# Altium PCB PCB1.PcbDoc
Units mm, origin at the board's own origin, x right, y up, seen from the top; angles counter-clockwise.
Board outline 83.06 x 37.72 mm, 2 copper layers (Top Layer, Bottom Layer); 17 components, 15 nets, 69 pads, 0 vias.
Unrouted connection lines stored in the file: 1.
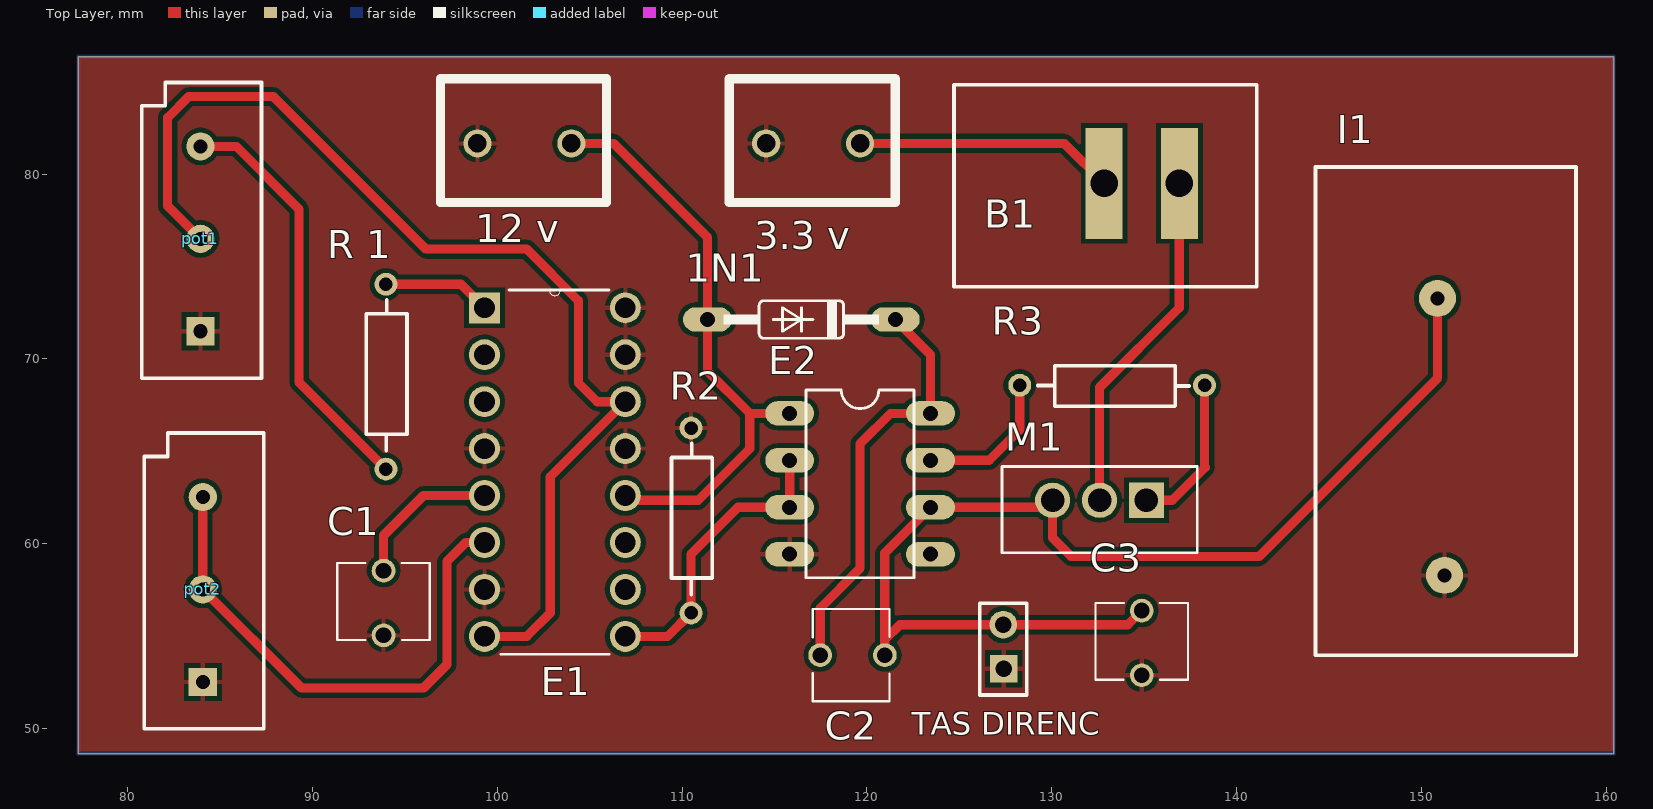
[diagram p0: Top Layer view]
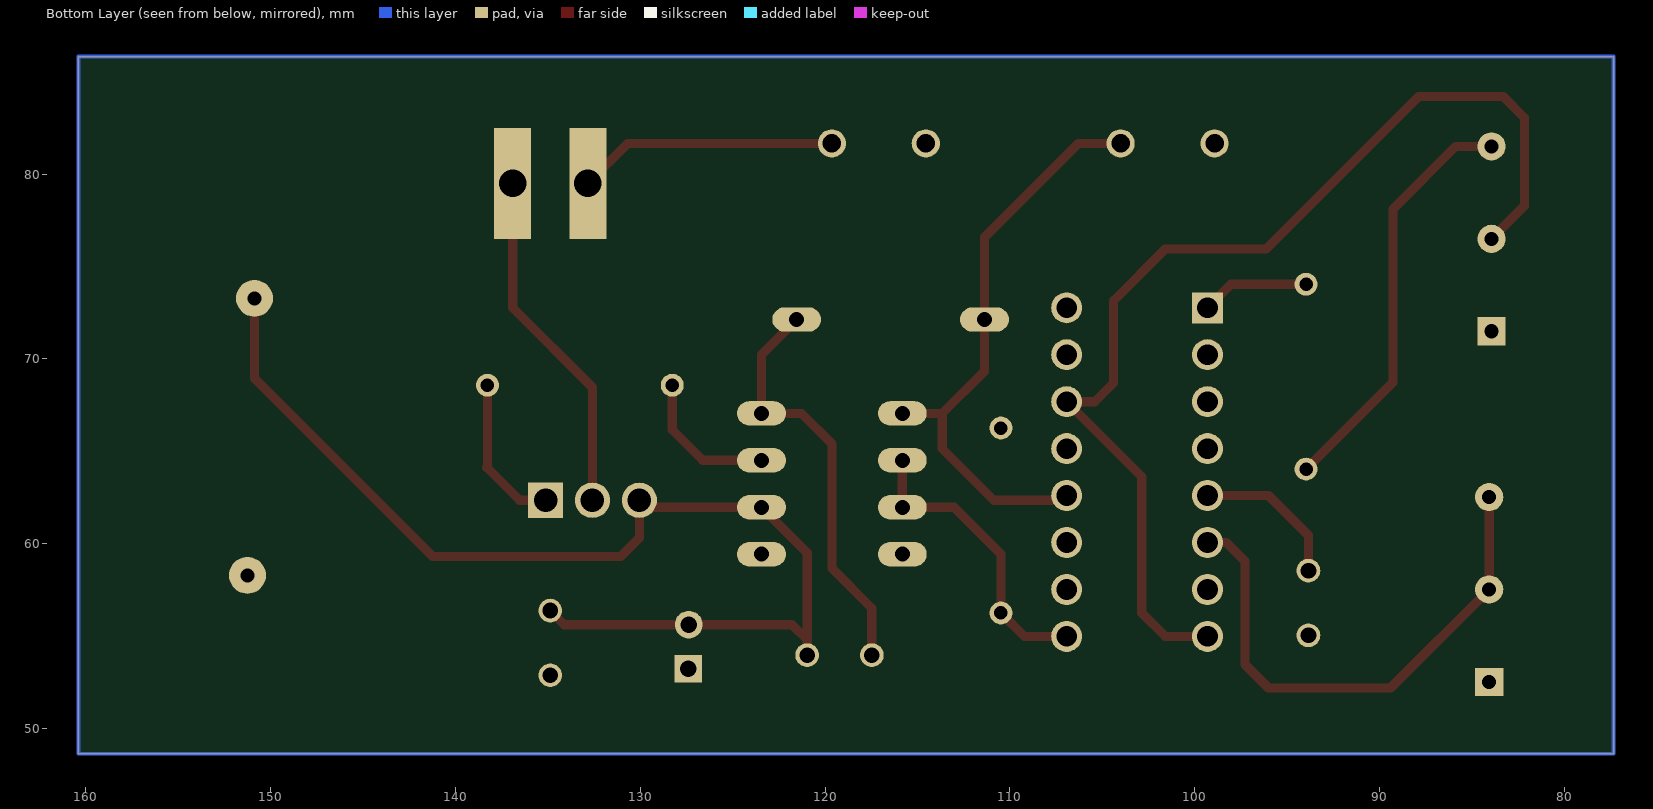
[diagram p1: Bottom Layer view, seen from below]
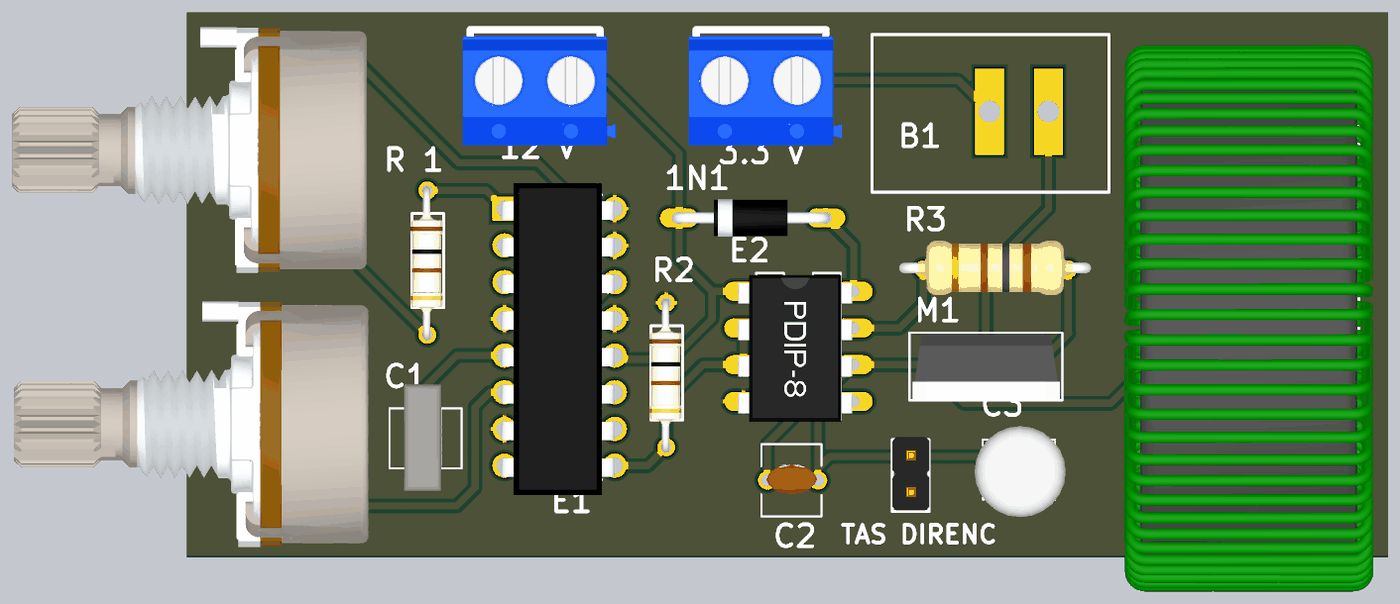
[diagram p2: 3D render of the assembled board from above, using the file's embedded part models]

## Layer stack, top to bottom
Top Solder: solder mask 0.0102, Solder Resist, Dk 3.5
Top Layer: signal copper 0.0356
Dielectric 1: dielectric 0.32, FR-4, Dk 4.8
Bottom Layer: signal copper 0.0356
Bottom Solder: solder mask 0.0102, Solder Resist, Dk 3.5

## Board outline
77.343,48.641 77.343,86.36 160.401,86.36 160.401,48.641

## Design rules (kind name [scope] priority, off if disabled: settings)
Clearance [All] p1: gap=0.254 ignorepadtopadclearanceinfootprint=FALSE except(0: Arc-Hole Track-Hole SMDPad-Hole THPad-Hole Via-Hole Fill-Hole Poly-Hole Region-Hole Text-Hole)
HoleToHoleClearance [All] p1: gap=0.1 allowstackedmicrovias=TRUE
PolygonConnect [All] p1: connectstyle=Relief reliefconductorwidth=0.254 reliefentries=4 polygonreliefangle="90 Angle" airgapwidth=0.254
RoutingVias [All] p1: holewidth=0.711 width=1.27 viastyle="Through Hole" minholewidth=0.711 minwidth=1.27 maxholewidth=0.711 maxwidth=1.27
SolderMaskExpansion [All] p1: expansion=0.102
Width [All] p1: maxlimit=0.5 minlimit=0.254 preferedwidth=0.254 minimp=50.000000 maximp=50.000000 favimp=50.000000
29 further rules are at their usual default settings.

## Components (designator, comment, footprint, x,y, rotation, side; value= is the part's Value field where it differs from the comment)
1N1 "1N4158" 1N4158 122.809,72.898 r180 top
"3.3 v" "klemens" klemens 122.781,84.634 r180 top
"12 v" "klemens" klemens 107.16,84.634 r180 top
B1 "rocket switch" "rocket switch" 125.222,73.914 r0 top
C1 "0.01" "0,01 uf" 96.581,53.983 r90 top
C2 "0.02" 0,22uf 121.414,56.253 r180 top
C3 "100 uf" "100 uf" 137.602,51.824 r90 top
E1 "TL494" TL_494 99.695,53.975 r0 top
E2 "IR_2101" IR_2101 116.586,68.453 r270 top
I1 "inductor" induktor 150.876,73.279 r270 top
M1 "IRF510" IRF510 137.922,64.262 r180 top
pot1 "RPot" pot 83.947,71.501 r90 top value=10K
pot2 "RPot" pot 84.074,52.531 r90 top value=50K
R2 "1 k" 1k 114.554,55.499 r90 top
R3 "100 R" 100R 127.508,64.516 r0 top
"R 1" "1 k" 1k 98.044,63.279 r90 top
"TAS DIRENC" "HEADER 2" "HEADER 2" 125.375,51.793 r0 top (schematic designator "TAÞ DÝRENÇ")

## Footprints (in the part's own frame and the unit in brackets; to place one, negate y for a bottom-side part, rotate by r counter-clockwise, add the part's x,y. Pads: shape width x height; smd on the part's side, far side on the other; paste and mask are expansions set on the pad)
"0,01 uf" [mm]
  round 1.28 hole 0.85: 1(1.064,2.728) 1(1.064,2.728) 1(1.064,2.728) 1(1.064,2.728) 2(4.564,2.728)
  silkscreen extent 0.81,0.23 4.97,5.23, body extent -0.76,1.62 6.64,4.23, height 6.6
0,22uf [mm]
  round 1.28 hole 0.85: 1(0.439,2.278) 1(0.439,2.278) 1(0.439,2.278) 1(0.439,2.278) 2(3.939,2.278)
  silkscreen extent 0.19,-0.22 4.35,4.78, body extent 0.5,1.16 4,3.2, height 3.75
1k [mil]
  round 48.74 hole 28.74: 1(30,160) 1(30,160) 2(423.7,160)
  silkscreen extent 69,115 391,202, body extent 15,118 434,206, height 83
1N4158 [mil]
  oval 104x52 hole 32: A(450,30) C(50,30)
  silkscreen extent 85,-10 415,70, body extent 40,-20 470,80, height 100
"100 uf" [mm]
  round 1.28 hole 0.85: 1(1.064,2.728) 1(1.064,2.728) 1(1.064,2.728) 1(1.064,2.728) 2(4.564,2.728)
  silkscreen extent 0.81,0.23 4.97,5.23, body extent -0.4,-0.5 5.9,5.8, height 11
100R [mil]
  round 48.74 hole 28.74: 1(30,160) 1(30,160) 2(423.7,160)
  silkscreen extent 69,115 391,202, body extent -40,90 490,238, height 94
"HEADER 2" [mm]
  rect 1.5x1.5 hole 0.9: 1(2.031,1.448)
  round 1.5 hole 0.9: 2(2.006,3.833)
  silkscreen extent 0.74,0.02 3.28,5, body extent 0.76,0.1 3.3,5.18, height 8.89
induktor [mm]
  round 2 hole 0.762: 1(0,0) 2(14.986,0.381)
  silkscreen extent -7.11,-6.6 19.3,7.49, body extent -20.07,-8.75 41.92,8.5, height 42.84
IR_2101 [mil]
  oval 52x104 hole 32: 1(55,-30) 2(155,-30) 3(255,-30) 4(355,-30) 5(355,270) 6(255,270) 7(155,270) 8(55,270)
  silkscreen extent 5,5 405,235, body extent 10,-44 410,266, height 170
IRF510 [mil]
  rect 75x75 hole 50: 1(110,75)
  round 75 hole 50: 2(210,75) 3(310,75)
  silkscreen extent 2,3 418,187, body extent 8,6 410,184, height 613
klemens [mil]
  round 60 hole 39.37: 1(123.9,117.05) 2(323.9,117.05)
  silkscreen extent 49,-21 402,243, body extent 6,-4 423,295, height 394
pot [mil]
  rect 60x60 hole 30: 1(0,0)
  round 60 hole 30: 2(196.85,0) 3(393.7,0)
  silkscreen extent -100,-130 530,125, body extent -125,-230 545,735, height 807
"rocket switch" [mm]
  rect 2x6 hole 1.5: 1(11.684,5.588) 3(7.62,5.588)
  silkscreen extent -0.51,0 15.88,10.92, body extent 0.12,0.46 15.12,10.46, height 5.15
TL_494 [mil]
  rect 66x66 hole 44: 1(-15,740)
  round 66 hole 44: 2(-15,640) 3(-15,540) 4(-15,440) 5(-15,340) 6(-15,240) 7(-15,140) 8(-15,40) 9(285,40) 10(285,140) 11(285,240) 12(285,340) 13(285,440) 14(285,540) 15(285,640) 16(285,740)
  silkscreen extent 20,2 250,778, body extent -25,-40 285,810, height 165

## Part data
C1: library part "0,01 uf"
C2: library part "0,22 uf"
pot1 pot2: "Potentiometer", LatestRevisionDate=17-Jul-2002, LatestRevisionNote="Re-released for DXP Platform.", PackageDescription="Variable Resistor, Thru-Hole; 3 Leads", PackageReference=VR5, Published=8-Jun-2000, Publisher="Altium Limited", Set Position=0.5, Sim Note="Enter the Resistance value and the set point into parameter fields."
R3: library part 100R

## Nets (pads, with @x,y where several pads share a name; then routed paths per layer and width w, separated by ;. In a path a pad name is that pad's centre, name@x,y a point inside that pad or via, vN(x,y) a via of type N, cw(c..) or ccw(c..) an arc to the next point about the centre after c; other vN are vias at no path point)
GND: "3.3 v.2" "12 v.2" "TAS DIRENC.1" C1.1 C3.1 E1.4 E1.7 E1.13 E1.15 E1.16 E2.4 I1.2 pot1.1 pot2.1 R2.2
Net1N1_A: 1N1.A "12 v.1" E1.12 E2.1 | length 32
  Top Layer w0.5: 104.013,81.661 106.299,81.661 111.379,76.581 1N1.A 111.379,69.342 113.665,67.056 ; E1.12 107.188,62.357 110.871,62.357 113.665,65.151 113.665,67.056 ; E2.1 113.665,67.056
Net1N1_C: 1N1.C C2.2 E2.8 | length 22.7
  Top Layer w0.5: C2.2 117.475,56.515 119.634,58.674 119.634,65.405 121.285,67.056 E2.8 123.444,70.231 1N1.C
"Net3.3 v_1": "3.3 v.1" B1.3 | length 14.1
  Top Layer w0.5: 119.634,81.661 130.683,81.661 B1.3
NetB1_1: B1.1 M1.2 | length 18.9
  Top Layer w0.5: M1.2 132.588,68.453 136.906,72.771 B1.1
NetC1_2: C1.2 E1.5 | length 8.3
  Top Layer w0.5: C1.2 93.853,60.452 96.012,62.611 E1.5
NetC2_1: "TAS DIRENC.2" C2.1 C3.2 E2.6 I1.1 M1.3 | length 61.9
  Top Layer w0.5: C2.1@120.975,53.975 120.975,54.808 ; C3.2 134.112,55.626 127.381,55.626 121.793,55.626 120.975,54.808 ; I1.1 150.876,68.961 141.224,59.309 131.064,59.309 130.048,60.325 M1.3 129.667,61.976 E2.6 120.975,59.507 120.975,54.808
NetE1_1: "R 1.2" E1.1 | length 5.9
  Top Layer w0.5: 93.98,74.041 98.044,74.041 E1.1
NetE1_2: E1.2 E1.3
NetE1_6: E1.6 pot2.2 pot2.3 | length 29
  Top Layer w0.5: pot2.3 pot2.2 89.408,52.197 96.012,52.197 97.282,53.467 97.282,59.055 98.298,60.071 E1.6
NetE1_8: E1.8 E1.14 pot1.2 | length 59.2
  Top Layer w0.5: pot1.2 82.169,78.279 82.169,83.058 83.312,84.201 87.884,84.201 96.139,75.946 101.6,75.946 104.394,73.152 104.394,68.707 105.41,67.691 E1.14 102.87,63.627 102.87,56.261 101.6,54.991 E1.8
NetE1_9: E1.9 E2.2 E2.3 R2.1 | length 16.2
  Top Layer w0.5: E1.9 109.22,54.991 110.49,56.261 110.49,59.436 113.03,61.976 E2.3 E2.2
NetE2_7: E2.7 R3.1 | length 7.9
  Top Layer w0.5: E2.7 126.619,64.516 128.27,66.167 R3.1@128.27,68.58
NetM1_1: M1.1 R3.2 | length 8.4
  Top Layer w0.5: M1.1 136.525,62.357 138.303,64.135 138.27,64.168 R3.2
Netpot1_3: "R 1.1" pot1.3 | length 22.8
  Top Layer w0.5: pot1.3 85.885,81.501 89.281,78.105 89.281,68.74 93.98,64.041
pads on no net: E1.10 E1.11 E2.5
copper on no net: | length 241.6
  Bottom Layer w0.2: 77.343,48.641 160.401,48.641 160.401,86.36 77.343,86.36 77.343,48.641

## Polygon pours and split planes (outlines as drawn)
GND on Top Layer "GND_L01_P000" (solid, pour order 0): 77.343,86.487 77.47,86.36 160.401,86.36 160.401,48.895 160.274,48.768 77.343,48.768

## Dimensions
76.708,48.768 to 76.708,86.487 on Mechanical 15
77.343,47.625 to 160.274,47.625 on Top Layer